# Altium PCB Copy of PCB1.PcbDoc (part 2 of 2)
Units mil, origin at the board's own origin, x right, y up, seen from the top; angles counter-clockwise.
Board outline 1968.5 x 1865.39 mil, 6 copper layers (Top Layer, GND02, SIG03, PWR04, GND05, Bottom Layer), stack 59.435 mil thick; 118 components, 79 nets, 398 pads, 210 vias.
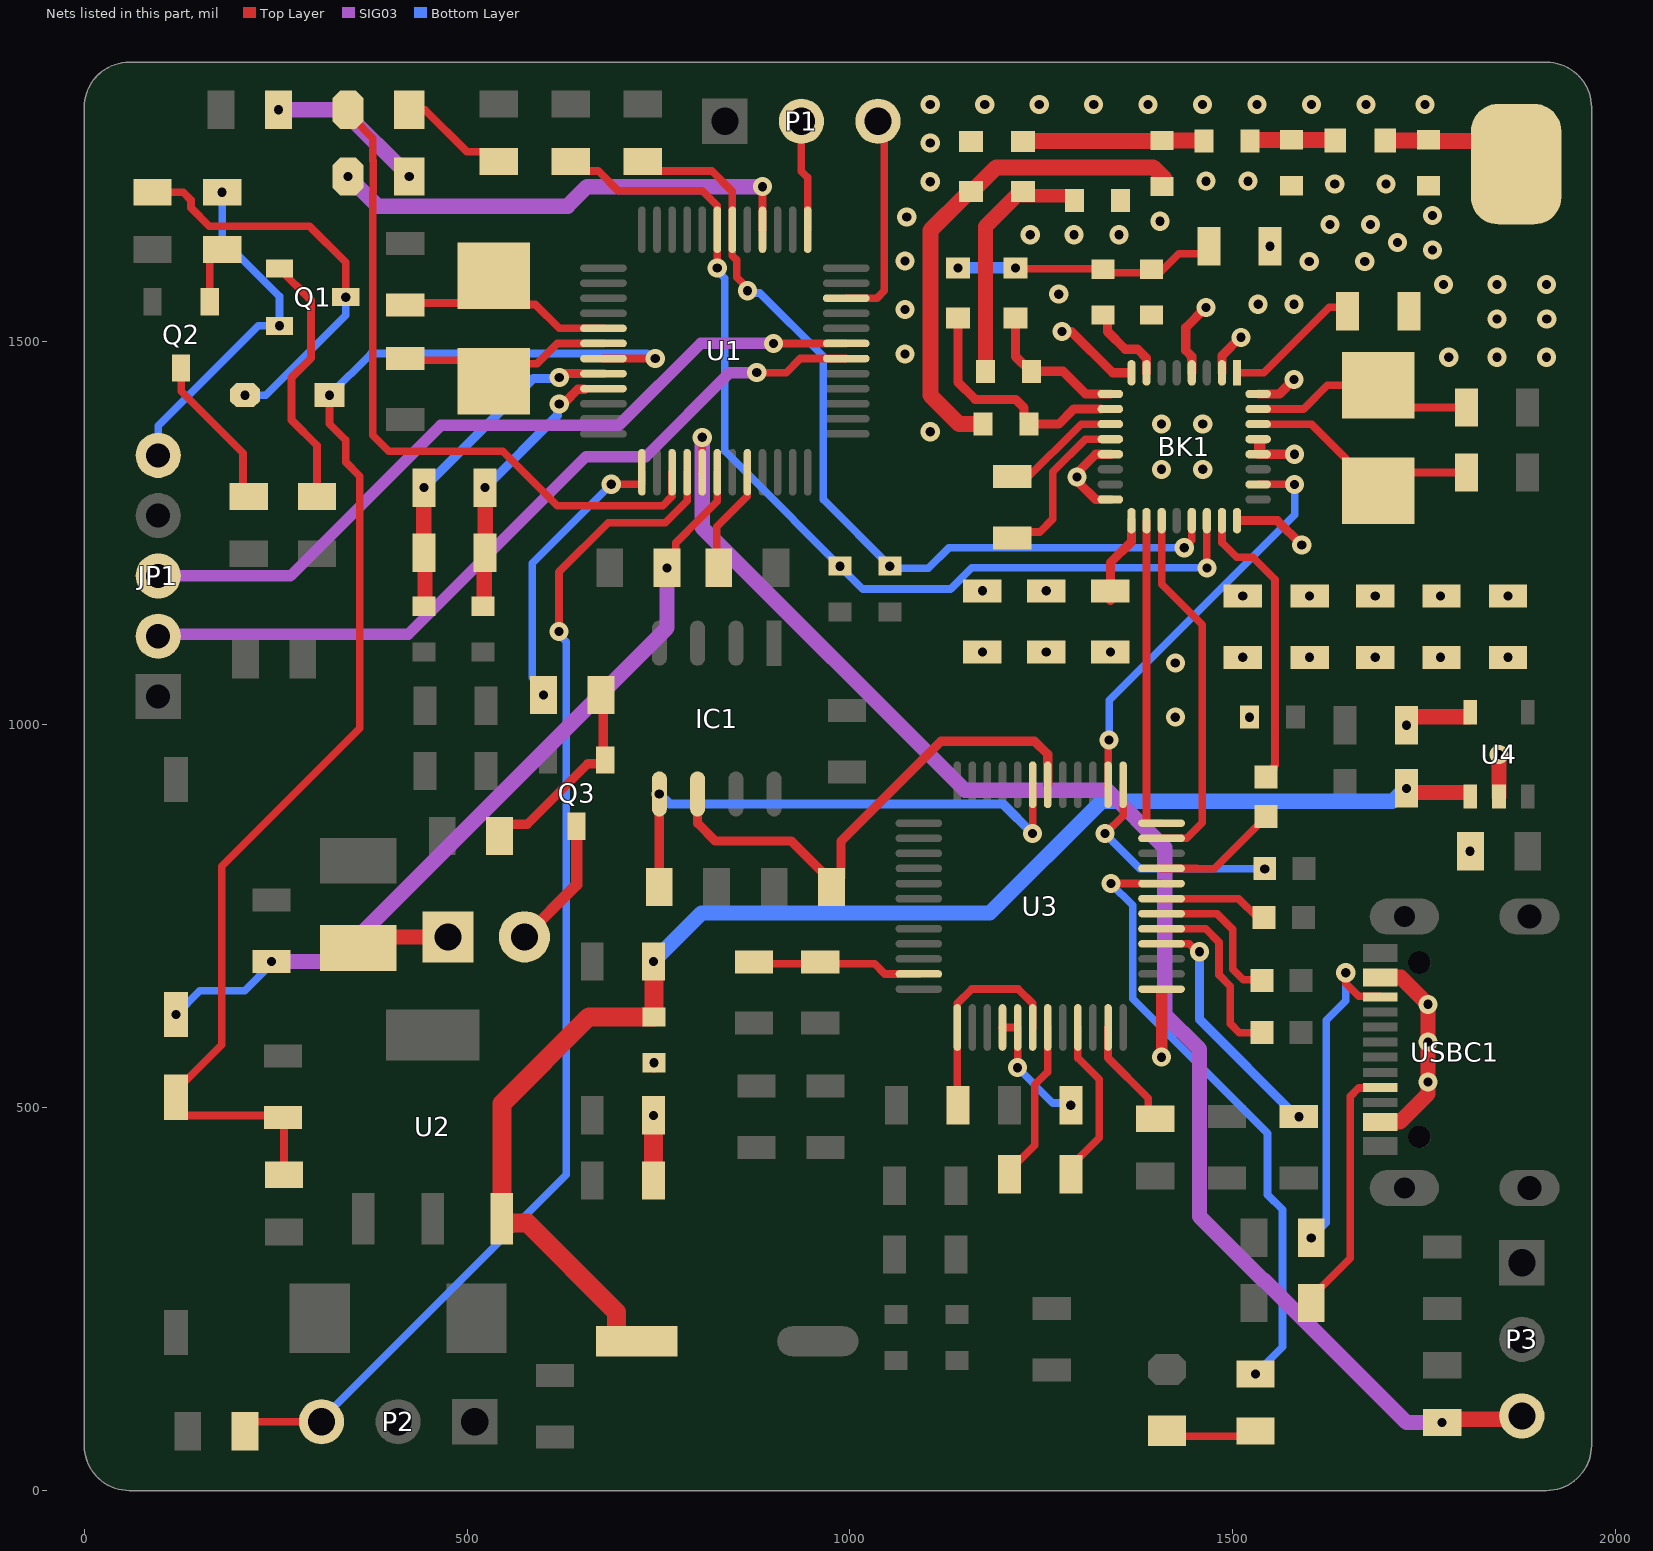
[diagram p6: the nets of this part, all layers, seen from the top]

## Via types
v1: diameter 25, hole 12, Top Layer to Bottom Layer, tented both sides, 198 vias
v2: diameter 20, hole 12, Top Layer to Bottom Layer, tented both sides, 11 vias
v3: diameter 30, hole 15, Top Layer to Bottom Layer, tented both sides, 1 vias

## Nets (pads, with @x,y where several pads share a name; then routed paths per layer and width w, separated by ;. In a path a pad name is that pad's centre, name@x,y a point inside that pad or via, vN(x,y) a via of type N, cw(c..) or ccw(c..) an arc to the next point about the centre after c; other vN are vias at no path point) (continued)
GNDRF: "BK1. " C1.1 C2.1 C4.1 C5.1 C6.1 C7.1 C16.2 C17.2 C18.2 C22.1 C25.2 C30.1 C31.1 C32.1 FB7.2 L5.1 R32.1 U4.2 | length 55.1
  Top Layer w20: U4.2@1847.72,906.25 v1(1847.72,961.37)
  other v1: 1810,835 1425,1010 1522,1010 1424.99,1080.8 1513,1088.21 1600.38,1088.21 1686.06,1088.21 1771.14,1088.21 1859.33,1088.21 1173,1095 1256.37,1095 1340.17,1095 1407.12,1333.67 1460.85,1333.67 1105,1382.65 1407.12,1392.74 1460.85,1392.74 1782.1,1480 1845,1480 1909.9,1480 1072,1484.25 1845,1530 1910,1530 1072,1542.46 1533.15,1549.29 1579.84,1549.29 1272.75,1562.41 1775,1575 1845,1575 1909.9,1575 1599.87,1605 1672.43,1605 1072,1605.79 1760.87,1620.01 1548.66,1625.01 1715,1630 1235.59,1640.09 1292.55,1640.09 1351.49,1640.09 1627.1,1653.39 1680,1653.39 1404.87,1657.64 1074.18,1663.15 1760.87,1665 1633.21,1706.46 1700,1706.46 1105,1709.2 1465,1710 1520,1710 1105,1759.7 1105,1810 1176.11,1810 1247.22,1810 1318.33,1810 1389.44,1810 1460.56,1810 1531.67,1810 1602.78,1810 1673.89,1810 1750.88,1810
LED1: LED1.2 U1.15 | length 890.9
  Top Layer w10: LED1.2@350.66,1792.57 377.05,1766.18 377.05,1737.03 377.58,1736.5 377.58,1695.73 377.05,1695.2 377.05,1378.14 397.94,1357.24 546.75,1357.24 617.75,1286.23 755.49,1286.23 767.68,1298.42 767.68,1329.67 U1.15@767.76,1329.74
LED3: LED3.2 U1.40 | length 624
  Top Layer w10: U1.40@885.87,1646.67 v1(885.87,1702.82)
  SIG03 w20: v1(344.58,1716.11) 383.31,1677.38 631.39,1677.38 656.83,1702.82 v1(885.87,1702.82)
NetANT1_1: ANT1.1 C16.1 L3.1 | length 208.7
  Top Layer w20: L3.1@1696.5,1763.23 L3.1@1696.79,1762.94 ; C16.1@1755.58,1762.94 C16.1@1755.87,1762.64 ; ANT1.1@1839.64,1762.64 ANT1.1@1870,1732.28 ; ANT1.1@1851.64,1708.21 ANT1.1@1867.47,1724.03
  Top Layer w21: L3.1@1696.79,1762.94 C16.1@1755.58,1762.94 ; C16.1@1755.87,1762.64 ANT1.1@1839.64,1762.64
NetBK1_1: BK1.1 C6.2 | length 184.8
  Top Layer w10: BK1.1@1505.57,1459.71 1540.46,1459.71 1625.96,1545.21 1646.86,1545.21 C6.2@1652.6,1550.95
NetBK1_7: BK1.7 FB1.2 | length 112.8
  Top Layer w10: FB1.2@1330.58,1539.41 FB1.2@1336.31,1533.68 ; BK1.7@1387.27,1459.87 BK1.7@1387.43,1459.71
  Top Layer w12: FB1.2@1336.31,1533.68 1336.31,1513.69 1359.56,1490.44 1375.78,1490.44 1387.27,1478.95 BK1.7@1387.27,1459.87
NetBK1_9: BK1.9 C9.1 L1.1 | length 195.6
  Top Layer w12: L1.1@1216.34,1532.47 1216.34,1480.93 1235.59,1461.68 1278.25,1461.68 1307.81,1432.12 BK1.9@1340.15,1432.12
NetBK1_10: BK1.10 C15.1 L2.1 | length 313.5
  Top Layer w12: L2.1@1141.18,1530.47 1141.18,1447.43 1163.61,1425 1216.21,1425 1227.5,1413.71 1227.5,1399.24 C15.1@1234,1392.74 ; C15.1@1229.59,1392.75 1272.75,1392.75 1292.42,1412.42 BK1.10@1327.92,1412.42
NetBK1_11: BK1.11 C21.1 | length 173.3
  Top Layer w10: C21.1@1227.11,1317.94 1301.92,1392.74 BK1.11@1340.15,1392.74
  Top Layer w15: C21.1@1221.99,1331.6 1211.99,1321.6 C21.1@1227.1,1321.6
NetBK1_12: BK1.12 C21.2 | length 217.6
  Top Layer w10: C21.2@1211.99,1244.2 1219.56,1251.77 1247.99,1251.77 1265,1268.78 1265,1330.37 1307.68,1373.05 BK1.12@1340.15,1373.05
NetBK1_17: BK1.17 C31.2 | length 115.7
  Top Layer w12: C31.2@1340.16,1162.4 1340.16,1211.57 1367.74,1239.15 BK1.17@1367.74,1266.71
NetBK1_30: BK1.30 C20.1 Y1.2 | length 322.7
  Top Layer w10: BK1.30@1533.15,1392.74 1602.85,1392.74 1647.76,1347.83 1647.76,1343.9 1686.06,1305.59 Y1.2@1690,1305.59 1713.89,1329.48 C20.1@1807.6,1329.48
NetBK1_31: BK1.31 C19.1 Y1.1 | length 299.2
  Top Layer w10: BK1.31@1533.15,1412.43 1592.43,1412.43 1623.39,1443.39 Y1.1@1690,1443.39 1718.9,1414.48 C19.1@1807.6,1414.48
NetC1_2: C1.2 C2.2 FB1.1 L1.2 L2.2 | length 349
  Top Layer w10: v2(1216.34,1596.64) 1217.52,1595.46 1325.71,1595.46 1330.58,1590.59 1393.82,1590.59 1404.87,1590.59 1429.29,1615 C2.2@1477.6,1615
  Bottom Layer w15: v2(1141.18,1596.64) v2(1216.34,1596.64)
NetC3_2: C3.2 R1.1 SW1.1 U1.18 | length 1057.8
  Top Layer w10: R1.1@772.38,1225.01 772.38,1237.48 802.65,1267.75 826.73,1291.83 826.73,1329.67 U1.18@826.81,1329.74
  SIG03 w20: v1(244.65,690.96) 325.43,690.96 761.14,1126.68 v1(761.14,1205.01)
  Bottom Layer w10: v1(120,621.59) 151,652.59 209.44,652.59 244.65,687.8 v1(244.65,690.96)
NetC7_2: C7.2 C9.2 L4.2 | length 322
  Top Layer w18: L4.2@1226.14,1691 C7.2@1285.22,1691 ; C7.2@1293.31,1685 C7.2@1293.31,1689.42
  Top Layer w20: C9.2@1177,1461.67 1177,1650.71 L4.2@1226.14,1699.85
NetC8_1: C8.1 C14.2 L4.1 | length 237.3
  Top Layer w20: C14.2@1407.62,1762.64 C14.2@1408.21,1763.23
  Top Layer w21: L4.1@1226.34,1762.64 C14.2@1407.62,1762.64 ; C14.2@1408.21,1763.23 C8.1@1463.35,1763.23
NetC8_2: C8.2 C17.1 L3.2 | length 111.3
  Top Layer w18: L3.2@1633.21,1763.53 L3.2@1633.5,1763.23
  Top Layer w20: C8.2@1522.41,1763.83 C8.2@1522.7,1763.53
  Top Layer w21: C8.2@1522.7,1763.53 L3.2@1633.21,1763.53
NetC14_1: C14.1 C15.2 L5.2 | length 646.2
  Top Layer w18: L5.2@1151.32,1691.89 1151.32,1693.1 L5.2@1158.07,1699.85
  Top Layer w21: L5.2@1151.32,1691.89 1105,1645.57 1105,1430.49 1142.75,1392.75 C15.2@1174,1392.74 ; L5.2@1160,1696.71 1191.25,1727.96 1395.99,1727.96 C14.1@1411.05,1712.9
NetC26_2: C26.2 U1.5 Y2.2 | length 309.1
  Top Layer w10: C26.2@419.49,1550.92 515.99,1550.92 551.65,1586.59 551.65,1574.54 577.24,1548.95 589.3,1548.95 620.43,1517.81 678.11,1517.81 U1.5@678.19,1517.74
NetC27_2: C27.2 U1.6 Y2.1 | length 290.4
  Top Layer w10: C27.2@419.49,1476.02 524.43,1476.02 551.65,1448.79 574.63,1471.77 591.39,1471.77 617.59,1497.97 U1.6@678.19,1498.05 U1.6@678.19,1498.05
NetC38_1: C38.1 U3.43 | length 211.1
  Top Layer w10: C38.1@1211.1,413.21 1211.1,420.71 1241.6,451.21 1241.6,529.97 1258.35,546.72 U3.43@1258.35,604.74
NetC38_2: C38.2 U3.45 | length 219.7
  Top Layer w10: C38.2@1285.9,413.21 1285.9,420.71 1325.77,460.58 1325.77,536.91 1297.72,564.97 U3.45@1297.72,604.74
NetC40_2: C40.2 U3.37 U3.42 | length 278.9
  Top Layer w10: C40.2@1138.54,503.21 1140.24,504.9 U3.37@1140.24,604.74 1140.31,604.82 1140.31,636.07 1159.18,654.94 1219.71,654.94 1238.58,636.07 1238.58,604.82 U3.42@1238.66,604.74
NetC41_2: C41.2 U3.4 | length 324.6
  Top Layer w10: U3.4@1406.97,714 1443.17,714 1453.53,703.64 v1(1456.53,703.64)
  Bottom Layer w12: v1(1456.53,703.64) 1456.53,615.42 1583.75,488.21 v1(1586.34,488.21)
NetC42_2: C42.2 U3.40 U3.41 | length 162
  Top Layer w10: U3.40@1199.29,604.74 U3.41@1218.98,604.74 v1(1218.98,552.28)
  Bottom Layer w10: v1(1218.98,552.28) 1265.17,506.08 1285.63,506.08 v1(1288.5,503.21)
NetC43_2: C43.2 C44.2 U3.35 | length 220.9
  Top Layer w10: C43.2@874.64,687.81 961.26,687.81 1032.19,687.81 1045.37,674.63 U3.35@1090.04,674.63
NetD1_2: D1.2 Q1.3 R8.2 | length 540
  Top Layer w10: R8.2@89.26,1695.61 129.26,1695.61 139.53,1685.33 139.53,1675.39 163.61,1651.31 294.28,1651.31 341.61,1603.97 v2(341.61,1558.48)
  Bottom Layer w10: v1(210.08,1430.53) 237.28,1430.53 341.61,1534.86 v2(341.61,1558.48)
NetIC1_5: IC1.5 R24.1 U3.19 | length 694.4
  Top Layer w10: v1(1238.66,857.88) U3.19@1238.66,921.67
  Top Layer w12: R24.1@751.1,788.21 v2(751.1,909.78)
  Bottom Layer w12: v2(751.1,909.78) 764.36,896.53 1200.02,896.53 v1(1238.66,857.88)
NetIC1_6: IC1.6 R23.1 U3.18 | length 688
  Top Layer w10: R23.1@975.91,795.71 R23.1@975.91,788.21 R23.1@988.41,800.71 ; U3.18@1258.27,921.75 U3.18@1258.35,921.67
  Top Layer w12: IC1.6@801.1,909.78 801.1,871.35 824.23,848.23 923.39,848.23 R23.1@975.91,795.71 ; R23.1@988.41,800.71 988.41,848.05 1118.98,978.62 1241.13,978.62 1258.27,961.49 U3.18@1258.27,921.75
NetLED1_1: LED1.1 R2.1 | length 129.1
  Top Layer w10: LED1.1@440.02,1803.21 445.02,1803.21 499.92,1748.3 528.74,1748.3 R2.1@541.24,1735.8
NetLED2_1: LED2.1 R22.1 | length 119.3
  Top Layer w10: LED2.1@1415,81.22 1425.48,70.74 R22.1@1530,70.74
NetLED3_1: LED3.1 R28.1 | length 207.1
  SIG03 w20: v1(253.6,1803.21) 337.48,1803.21 v1(424.58,1716.11)
NetLED4_1: LED4.1 R31.1 | length 111.4
  Top Layer w20: R31.1@370.43,706.54 386.9,723.02 LED4.1@475,723.02
NetLED4_2: LED4.2 Q3.3 | length 172.7
  Top Layer w15: LED4.2@575,723.02 643.05,791.07 Q3.3@643.05,867.56
NetQ1_1: Q1.1 R9.2 | length 339.2
  Top Layer w10: Q1.1@255,1595.89 296.2,1554.69 296.2,1478.98 270.78,1453.56 270.78,1398.11 304.16,1364.74 R9.2@304.16,1298.14
NetQ2_1: Q2.1 R10.2 | length 77
  Top Layer w10: Q2.1@164.06,1552.58 164.06,1608.31 176.56,1620.81 R10.2@180.19,1620.81
NetQ2_3: Q2.3 R11.1 | length 204.4
  Top Layer w10: Q2.3@126.65,1465.96 126.65,1435.51 207.5,1354.67 207.5,1305.65 R11.1@215,1298.15
NetQ3_1: Q3.1 R29.1 R30.2 | length 266.9
  Top Layer w12: R30.2@542.4,854.91 542.4,858.6 553.9,870.1 578.65,870.1 657.67,949.11 675.38,949.11 Q3.1@680.45,954.18 ; Q3.1@677.9,954.18 R29.1@677.9,1039.74
NetR3_1: R3.1 U1.20 | length 121.6
  Top Layer w10: R3.1@826.1,1224.74 826.1,1258.42 866.1,1298.42 U1.20@866.18,1329.74 U1.20@866.18,1329.74
NetR14_1: R14.1 U3.47 | length 144.7
  Top Layer w10: U3.47@1337.09,604.74 1337.09,564.87 1389.7,512.26 1389.7,494.66 R14.1@1398.74,485.61
NetR15_1: R15.1 U3.7 | length 144.2
  Top Layer w10: U3.7@1406.97,773.05 1507.48,773.05 1531.89,748.64 R15.1@1541.07,748.64
NetR17_1: R17.1 U3.13 | length 301.1
  Top Layer w10: v1(1333.15,857.88) 1356.77,881.51 U3.13@1356.77,921.67
  Bottom Layer w10: v1(1333.15,857.88) 1378.85,812.18 v1@1541.75,812.18
  other v1: 1541.75,811.64
NetR22_2: R22.2 U3.8 | length 814
  Top Layer w10: v1(1340.81,792.74) U3.8@1406.97,792.74
  Bottom Layer w10: v1(1340.81,792.74) 1369.21,764.34 1369.21,642.51 1545.32,466.4 1545.32,386.31 1565,366.63 1565,187.63 v1(1529.77,152.4)
NetR25_2: R25.2 USBC1.A5 | length 334.9
  Top Layer w10: R25.2@1602.4,245 1602.4,252.5 1653.39,303.49 1653.39,514.6 1664.58,525.79 1691.77,525.79 USBC1.A5@1692.56,526.58
NetR26_1: R26.1 USBC1.B5 | length 431
  Top Layer w10: v1(1647.49,676.19) 1647.49,662.51 1664.54,645.46 1691.79,645.46 USBC1.B5@1692.56,644.69
  Bottom Layer w10: v1(1602.4,330) 1621.99,349.58 1621.99,614.03 1647.49,639.53 v1(1647.49,676.19)
NetR27_1: R27.1 U3.9 | length 160.4
  Top Layer w10: U3.9@1406.97,812.42 1453.2,812.42 1453.43,812.19 1475.94,812.19 R27.1@1540.5,876.74
NetR29_2: R29.2 U1.13 | length 379.6
  Top Layer w10: v1(688.35,1314.17) 728.31,1314.17 728.39,1314.25 U1.13@728.39,1329.74
  Bottom Layer w10: v1(599.98,1039.03) 597.11,1041.9 597.11,1049.78 585.13,1061.76 585.13,1210.95 v1(688.35,1314.17)
PA13: P1.3 U1.34 | length 278.8
  Top Layer w10: U1.34@995.12,1557.11 995.2,1557.18 1035.37,1557.18 1045,1566.82 1045,1779.86 P1.3@1036.65,1788.21
PA14: P1.2 U1.37 | length 145
  Top Layer w10: P1.2@936.65,1788.21 936.65,1722.96 944.92,1714.69 U1.37@944.92,1646.67
pcm_lrck: BK1.18 U3.12 | length 414.7
  Top Layer w10: BK1.18@1387.43,1266.71 1387.43,871.56 1387.51,871.48 U3.12@1406.97,871.48
pcm_mclk: BK1.23 R27.2 | length 380.8
  Top Layer w10: BK1.23@1485.88,1266.71 1486.04,1266.55 1486.04,1237.73 1505.08,1218.69 1526.2,1218.69 1555.05,1189.84 1555.05,947.49 1553.63,946.07 1553.63,941.63 R27.2@1543.63,931.63
pcm_sck: BK1.19 U3.11 | length 478
  Top Layer w10: U3.11@1406.97,851.79 1407.05,851.87 1439.9,851.87 1460,871.97 1460,1130.61 1407.12,1183.49 BK1.19@1407.12,1266.71
pcm_sda: BK1.26 U3.14 | length 540.8
  Top Layer w10: U3.14@1337.09,921.67 1337.17,921.75 1337.17,978.62 v1(1338.54,980) ; BK1.26@1533.15,1313.98 v1(1580.75,1313.98)
  Bottom Layer w10: v1(1338.54,980) 1338.54,1031.92 1580.75,1274.13 v1(1580.75,1313.98)
pwm1: P2.3 R12.1 U1.16 | length 1604
  Top Layer w10: R12.1@210,77.5 222.44,89.94 P2.3@310,89.94 ; v1(620,1121.9) 620,1199.55 684.47,1264.02 758.74,1264.02 787.36,1292.64 787.36,1329.67 U1.16@787.44,1329.74
  Bottom Layer w10: P2.3@300.96,83.9 629.67,412.6 629.67,1108.55 620,1118.22 v1(620,1121.9)
pwm2: P3.3 R13.1 U1.17 | length 1977.1
  Top Layer w10: U1.17@807.13,1329.74 v1(807.13,1375.46)
  Top Layer w20: v1(1773.4,88.79) 1777.75,93.14 1873.14,93.14 P3.3@1877.5,97.5
  SIG03 w20: v1(807.13,1375.46) 807.13,1257.87 1150.43,914.57 1336.22,914.57 1411.05,839.75 1411.05,621.99 1456.55,576.49 1456.55,357.93 1538.97,275.5 1540.23,275.5 1726.94,88.79 v1(1773.4,88.79)
RESET: C33.2 D1.1 R7.1 SW2.2 U1.7 | length 1778.1
  Top Layer w10: SW2.2@124.08,489.81 C33.2@253.17,489.81 ; SW2.2@125,501.05 125,527.32 179.71,582.03 179.71,815.35 360,995.65 360,1324.83 341.61,1343.21 341.61,1371.93 320.31,1393.23 v1(320.31,1430.53) D1.1@320.31,1433.53 ; C33.2@253.17,489.92 259.59,489.92 260.87,488.64 R7.1@260.87,412.4 ; U1.7@678.19,1478.37 v1(745.79,1478.37)
  Bottom Layer w10: v1(320.31,1430.53) 374.65,1484.87 735.23,1484.87 741.73,1478.37 v1(745.79,1478.37)
RF3V3: BK1.2 BK1.4 BK1.8 BK1.13 BK1.16 BK1.24 BK1.28 BK1.29 BK1.32 C4.2 C5.2 C18.1 C22.2 C25.1 C30.2 C32.2 C53.1 U4.5 | length 686.7
  Top Layer w12: v1(1277.16,1513.69) 1289.17,1513.69 1343.15,1459.71 BK1.8@1366,1459.71 ; BK1.16@1340.15,1294.29 1321.07,1294.29 1298.99,1316.37 1298.99,1331.29 1321.07,1353.36 BK1.13@1340.15,1353.36 ; BK1.4@1446.5,1459.71 1446.5,1481.03 1438.5,1489.02 1438.5,1518.71 v1(1465,1545.21) ; BK1.2@1485.88,1459.71 1485.88,1481.96 1509.96,1506.04 v1(1510.75,1506.04) ; BK1.24@1507,1266.71 1558.29,1266.71 v1(1590,1235) ; BK1.28@1533.15,1353.36 v1(1580.75,1353.37) ; BK1.32@1533.15,1432.12 1561.06,1432.12 v1(1579.84,1450.91)
  Top Layer w15: BK1.28@1535.12,1356 BK1.29@1535.12,1370
  Top Layer w20: v1(1726.68,999.41) 1726.68,1005.74 1731.68,1010.74 U4.5@1809.17,1010.74
  other v1: 1513,1168.21 1600.38,1168.21 1686.06,1168.21 1771.14,1168.21 1859.33,1168.21 1173,1175 1256.37,1175 1296.51,1323.83
RTS: JP1.5 Q1.2 R10.1 | length 456.5
  Bottom Layer w10: JP1.5@96.65,1351.95 96.83,1352.13 96.83,1390.62 227.3,1521.08 v2(255,1521.08) 255,1559.51 180.19,1634.31 v1(180.19,1695.61)
RX: JP1.3 U1.31 | length 1024.2
  Top Layer w10: v1(900.06,1498.05) U1.31@995.12,1498.05
  SIG03 w15: JP1.3@96.65,1194.47 269.31,1194.47 465.94,1391.1 698.12,1391.1 805.07,1498.05 v1(900.06,1498.05)
SCK: BK1.21 C28.2 R4.2 U1.42 | length 1151.6
  Top Layer w10: R4.2@729.62,1735.81 742.12,1723.31 819.62,1723.31 846.42,1696.52 U1.42@846.5,1646.67 846.57,1646.59 846.57,1612.77 852.31,1607.04 852.31,1584.75 866.18,1570.88 v1(866.18,1566.82) ; v1(1436.65,1231.27) 1446.34,1240.95 1446.34,1266.55 BK1.21@1446.5,1266.71
  Bottom Layer w10: v1(866.18,1566.82) 869.05,1563.95 882.11,1563.95 965,1481.06 965,1294.31 1054.98,1204.34 1102.46,1204.34 1129.4,1231.27 v1(1436.65,1231.27)
  other v1: 1052.11,1207.21
SDA: BK1.22 C29.2 R5.2 U1.43 | length 1317.1
  Top Layer w10: R5.2@635.43,1735.81 647.93,1723.31 671.43,1723.31 697.13,1697.61 807.13,1697.61 826.73,1678 826.73,1646.75 U1.43@826.81,1646.67 v1(826.81,1596.48) ; v1(1466.19,1205) BK1.22@1466.19,1266.71
  Bottom Layer w10: v1(826.81,1596.48) 826.81,1592.96 836.65,1583.12 836.65,1357.66 1017.02,1177.29 1131.4,1177.29 1159.11,1205 v1(1466.19,1205)
  other v1: 987.11,1207.21
TX: JP1.2 U1.30 | length 1048.7
  Top Layer w10: v1(878.33,1460) 916.82,1460 935.18,1478.37 U1.30@995.12,1478.37
  SIG03 w15: JP1.2@96.65,1115.73 98.93,1118 422.96,1118 655.37,1350.41 733.6,1350.41 843.19,1460 v1(878.33,1460)
UDM: R21.1 U3.6 | length 197.6
  Top Layer w10: U3.6@1406.97,753.37 1479.41,753.37 1500.03,732.74 1500.03,680.79 1513.77,667.06 1536.7,667.06 R21.1@1537.91,665.84
UDP: R20.2 U3.5 | length 240.9
  Top Layer w10: U3.5@1406.97,733.68 1464.47,733.68 1482.03,716.12 1482.03,673.34 1496.57,658.79 1496.57,609.93 1508.57,597.94 R20.2@1537.92,597.94
USB_5V: C23.1 C49.2 C52.1 FB5.1 U2.3 U4.1 | length 1889.8
  Top Layer w20: v1(1726.68,917.03) 1726.68,916.64 1731.68,911.64 U4.1@1809.17,911.64
  Top Layer w25: C23.1@721.89,195 704.95,195 695.27,204.69 695.27,232.97 578.6,349.64 550.32,349.64 545.55,354.4 U2.3@545.55,355 545.55,505.12 659.07,618.64 FB5.1@744.03,618.64 744.03,690.52 v1(743.5,691.05)
  Bottom Layer w20: v1(743.5,691.05) 743.5,691.56 806.25,754.31 1182.63,754.31 1328.32,900 1708.3,900 1725.33,917.03 v1(1726.68,917.03)
VBUS: C50.2 C51.2 FB5.2 U3.1 USBC1.A4 USBC1.A9 USBC1.B4 USBC1.B9 | length 431.5
  Top Layer w15: v1(1406.97,566) 1406.97,650
  Top Layer w20: USBC1.B9@1702.21,481.31 1718.15,481.31 1755,518.15 v1(1755,635) 1719.73,670.27 USBC1.B4@1702.21,670.27
  Top Layer w25: C50.2@743.5,395.38 v1(743.5,490) C51.2@743.77,490.26 ; FB5.2@743.77,558.64 v1(744.03,558.64)
  other v1: 1755,533.39 1755,585.63
VDDA: C12.2 C13.2 FB2.2 U1.9 | length 346.5
  Top Layer w12: v1(620.43,1419.1) 622.91,1421.59 628.11,1421.59 644.76,1438.23 U1.9@653.68,1438.23
  Top Layer w20: FB2.2@521.06,1154.9 522.36,1156.2 522.36,1226.04 523.66,1227.34 v1(523.66,1309.74)
  Bottom Layer w12: v1(523.66,1309.74) 617.94,1404.02 617.94,1416.61 v1(620.43,1419.1)
VSSA: C12.1 C13.1 FB3.2 U1.8 | length 451.6
  Top Layer w12: v1(620.43,1453.62) 625.49,1458.68 U1.8@678.19,1458.68
  Top Layer w20: v1(443.66,1309.74) 443.66,1227.42 445.06,1226.02 FB3.2@445.06,1154.9
  Bottom Layer w12: v1(443.66,1309.74) 443.86,1309.74 586.41,1452.29 619.1,1452.29 v1(620.43,1453.62)
pads on no net: BK1.5 BK1.6 BK1.14 BK1.15 BK1.20 BK1.25 BK1.27 IC1.7 U1.2 U1.3 U1.4 U1.10 U1.11 U1.12 U1.14 U1.19 U1.21 U1.22 U1.25 U1.27 U1.28 U1.29 U1.32 U1.33 U1.38 U1.39 U1.41 U1.45 U1.46 U3.10 U3.15 U3.16 U3.17 U3.20 U3.21 U3.22 U3.23 U3.24 U3.25 U3.26 U3.28 U3.29 U3.30 U3.31 U3.32 U3.33 U3.38 U3.39 U3.48 U4.4 USBC1. USBC1.A8 USBC1.B8

## Polygon pours and split planes (outlines as drawn)
GND on Bottom Layer "GND_L06_P003" (solid, pour order 3): 0,1865.39 0.39,1865 1968.5,1865 1968.5,3.5 1965,0 0,0
GND on Top Layer "GND_L01_P005" (solid, pour order 5): 1025.15,1026.72 1091.88,960 1968.5,960 1968.5,3.5 1965,0 0,0 0,1865.39 0.39,1865 1025.15,1865
GNDRF on Top Layer "GNDRF_L01_P004" (solid, pour order 4): 1043.11,1041.89 1106.38,978.62 1968.5,978.62 1968.5,1865 1043.11,1865
GND on SIG03 "GND_L03_P006" (solid, pour order 6): 0.39,1865 1968.5,1865 1968.5,0 0,0
RF3V3 on PWR04 (split plane): 1937.44,1346.87 1937.44,942.56 1463.13,942.56 1370.35,1035.35 1368.78,1036.55 1368.03,1036.86 1366.96,1037.31 1365,1037.56 1148.13,1037.56 1094.21,1091.49 1094.21,1420.22 1110.35,1436.36 1111.55,1437.92 1112.31,1439.75 1112.56,1441.71 1112.56,1542.46 1112.56,1550.67 1139.33,1577.44 1706.87,1577.44
VBUS on PWR04 (split plane): 1802.44,661.06 1802.44,617.27 1802.44,471.34 1782.56,451.47 1106.06,451.47 1104.1,451.21 1102.28,450.45 1100.71,449.25 1093.23,441.77 727.25,441.77 685.28,483.75 685.28,582.47 750.29,647.48 824.03,647.48 824.83,647.38 1125.24,647.38 1127.19,647.63 1128.26,648.08 1129.02,648.39 1130.59,649.59 1167.74,686.75 1315.29,686.75 1322.47,679.56 1324.04,678.36 1325.86,677.61 1327.82,677.35 1603.85,677.35 1605.81,677.61 1606.88,678.05 1607.64,678.36 1609.2,679.56 1629.75,700.12 1763.38,700.12
3V3 on PWR04 (split plane): 59.06,1845.3 1909.45,1845.3 1909.94,1845.35 1914.54,1845.04 1919.55,1844.05 1924.39,1842.41 1928.97,1840.15 1933.21,1837.31 1937.05,1833.94 1940.42,1830.1 1943.26,1825.86 1945.52,1821.28 1947.16,1816.44 1948.15,1811.43 1948.46,1806.83 1948.41,1806.34 1948.41,1357.29 1715.35,1590.35 1713.78,1591.55 1713.03,1591.86 1711.96,1592.31 1710,1592.56 1136.19,1592.56 1134.24,1592.31 1132.41,1591.55 1130.85,1590.35 1130.84,1590.35 1099.65,1559.15 1098.45,1557.59 1098.14,1556.83 1097.69,1555.76 1097.44,1553.81 1097.44,1553.8 1097.44,1542.46 1097.44,1444.84 1081.3,1428.7 1080.1,1427.14 1079.78,1426.38 1079.34,1425.31 1079.08,1423.35 1079.08,1088.35 1079.34,1086.39 1079.78,1085.33 1080.1,1084.57 1081.3,1083 1139.65,1024.65 1141.22,1023.45 1143.04,1022.69 1145,1022.44 1361.87,1022.44 1454.65,929.65 1456.22,928.45 1458.04,927.69 1460,927.44 1945,927.44 1946.96,927.69 1948.41,928.29 1948.41,59.06 1948.46,58.57 1948.15,53.96 1947.16,48.95 1945.52,44.12 1943.26,39.54 1940.42,35.29 1937.05,31.45 1933.21,28.08 1928.97,25.25 1924.39,22.99 1919.55,21.35 1914.54,20.35 1909.94,20.05 1909.45,20.1 59.06,20.1 58.57,20.05 53.96,20.35 48.95,21.35 44.12,22.99 39.54,25.25 35.29,28.08 31.45,31.45 28.08,35.29 25.25,39.54 22.99,44.12 21.35,48.95 20.35,53.96 20.05,58.57 20.1,59.06 20.1,1806.34 20.05,1806.83 20.35,1811.43 21.35,1816.44 22.99,1821.28 25.25,1825.86 28.08,1830.1 31.45,1833.94 35.29,1837.31 39.54,1840.15 44.12,1842.41 48.95,1844.05 53.96,1845.04 58.57,1845.35
GNDA on GND05 (split plane): 1914.54,1845.04 1919.55,1844.05 1924.39,1842.41 1928.97,1840.15 1933.21,1837.31 1937.05,1833.94 1940.42,1830.1 1943.26,1825.86 1945.52,1821.28 1947.16,1816.44 1948.15,1811.43 1948.46,1806.83 1948.41,1806.34 1948.41,1802.29 1905.4,1845.3 1909.45,1845.3 1909.94,1845.35
GNDRF on GND05 (split plane): 1893.45,1843.78 1892.69,1841.96 1892.44,1840 1892.69,1838.04 1893.45,1836.22 1894.65,1834.65 1937.44,1791.87 1937.44,893.13 1846.87,802.56 1528.13,802.56 1315.09,1015.61 1313.52,1016.81 1312.77,1017.12 1311.7,1017.57 1309.74,1017.82 1103.93,1017.82 994.67,1127.09 994.67,1828.78 1005.45,1839.55 1006.65,1841.12 1007.41,1842.94 1007.66,1844.9 1007.61,1845.3 1894.61,1845.3
GNDA on GND05 (split plane): 59.06,1845.3 989.8,1845.3 981.76,1837.26 980.55,1835.69 979.8,1833.87 979.54,1831.91 979.54,1123.96 979.54,1123.95 979.8,1122 980.55,1120.17 981.76,1118.61 1095.45,1004.91 1097.02,1003.71 1098.84,1002.95 1100.8,1002.69 1306.61,1002.69 1519.65,789.65 1521.22,788.45 1523.04,787.69 1525,787.44 1850,787.44 1851.96,787.69 1853.03,788.14 1853.78,788.45 1855.35,789.65 1948.41,882.71 1948.41,59.06 1948.46,58.57 1948.15,53.96 1947.16,48.95 1945.52,44.12 1943.26,39.54 1940.42,35.29 1937.05,31.45 1933.21,28.08 1928.97,25.25 1924.39,22.99 1919.55,21.35 1914.54,20.35 1909.94,20.05 1909.45,20.1 59.06,20.1 58.57,20.05 53.96,20.35 48.95,21.35 44.12,22.99 39.54,25.25 35.29,28.08 31.45,31.45 28.08,35.29 25.25,39.54 22.99,44.12 21.35,48.95 20.35,53.96 20.05,58.57 20.1,59.06 20.1,1806.34 20.05,1806.83 20.35,1811.43 21.35,1816.44 22.99,1821.28 25.25,1825.86 28.08,1830.1 31.45,1833.94 35.29,1837.31 39.54,1840.15 44.12,1842.41 48.95,1844.05 53.96,1845.04 58.57,1845.35
GND on GND02 (split plane): 1914.54,1845.04 1914.76,1845 1036.65,1845 1036.65,1370 1948.41,1370 1948.41,59.06 1948.46,58.57 1948.15,53.96 1947.16,48.95 1945.52,44.12 1943.26,39.54 1940.42,35.29 1937.05,31.45 1933.21,28.08 1928.97,25.25 1924.39,22.99 1919.55,21.35 1914.54,20.35 1909.94,20.05 1909.45,20.1 59.06,20.1 58.57,20.05 53.96,20.35 48.95,21.35 44.12,22.99 39.54,25.25 35.29,28.08 31.45,31.45 28.08,35.29 25.25,39.54 22.99,44.12 21.35,48.95 20.35,53.96 20.05,58.57 20.1,59.06 20.1,1806.34 20.05,1806.83 20.35,1811.43 21.35,1816.44 22.99,1821.28 25.25,1825.86 28.08,1830.1 31.45,1833.94 35.29,1837.31 39.54,1840.15 44.12,1842.41 48.95,1844.05 53.96,1845.04 58.57,1845.35 59.06,1845.3 1909.45,1845.3 1909.94,1845.35

## Keep-outs
Keep-Out Layer:
  the board outline again, w10

## Other copper
GND02 (plane layer: these items are gaps in the copper):
  lines w10: 757.45,735 802.28,735
  lines w40: 0,59.06 ccw(c59.06,59.06) 59.06,0 1909.45,0 ccw(c1909.45,59.06) 1968.5,59.06 1968.5,1806.34 ccw(c1909.45,1806.34) 1909.45,1865.39 59.06,1865.39 ccw(c59.06,1806.34) 0,1806.34 0,59.06
PWR04 (plane layer: these items are gaps in the copper):
  lines w15: 677.71,480.61 724.12,434.21 882.6,434.21 1096.36,434.21 1106.06,443.9 1333.87,443.9 1687.41,443.9 1785.69,443.9 1810,468.21 1810,617.27 1810,664.19 1766.51,707.68 1626.62,707.68 1603.85,684.91 1327.82,684.91 1318.43,694.31 1164.61,694.31 1125.24,654.94 937.21,654.94 824.83,654.94 824.72,655.05 747.15,655.05 677.71,585.6 677.71,480.61 ; 1086.65,1088.35 1145,1030 1365,1030 1460,935 1945,935 1945,1350 1710,1585 1136.19,1585 1105,1553.81 1105,1542.46 1105,1441.71 1086.65,1423.35 1086.65,1088.35
  lines w40: 0,59.06 ccw(c59.06,59.06) 59.06,0 1909.45,0 ccw(c1909.45,59.06) 1968.5,59.06 1968.5,1806.34 ccw(c1909.45,1806.34) 1909.45,1865.39 59.06,1865.39 ccw(c59.06,1806.34) 0,1806.34 0,59.06
GND05 (plane layer: these items are gaps in the copper):
  lines w15: 1000.1,1844.9 987.11,1831.91 987.11,1123.95 1100.8,1010.26 1309.74,1010.26 1525,795 1850,795 1945,890 1945,1795 1900,1840
  lines w40: 0,59.06 ccw(c59.06,59.06) 59.06,0 1909.45,0 ccw(c1909.45,59.06) 1968.5,59.06 1968.5,1806.34 ccw(c1909.45,1806.34) 1909.45,1865.39 59.06,1865.39 ccw(c59.06,1806.34) 0,1806.34 0,59.06

## Silkscreen, mask and mechanical layers (free items; w line width, h text height)
Top Overlay:
  text "FREQ" at 161,916 h35
  text "RESET" at 74,65.04 h35 r90
Mechanical 1:
  the board outline again, w10

## Text inside footprints (layer, text, board x,y; h text height)
C24: Mechanical 13 "BK9535" at 1335.32,1172.21 h35
Q1: Mechanical 1 "U1" at 308.54,1542.18 h35 r90
Q2: Mechanical 1 "U1" at 110.35,1499.04 h35
Q3: Mechanical 1 "U1" at 626.74,900.64 h35